# Altium PCB 2020-08-16_06-31-57.PcbDoc
Units mil, origin at the board's own origin, x right, y up, seen from the top; angles counter-clockwise.
Board outline 2200 x 1600 mil, 4 copper layers (Top Layer, MidLayer1, MidLayer2, Bottom Layer); 13 components, 5 nets, 26 pads, 25 vias.
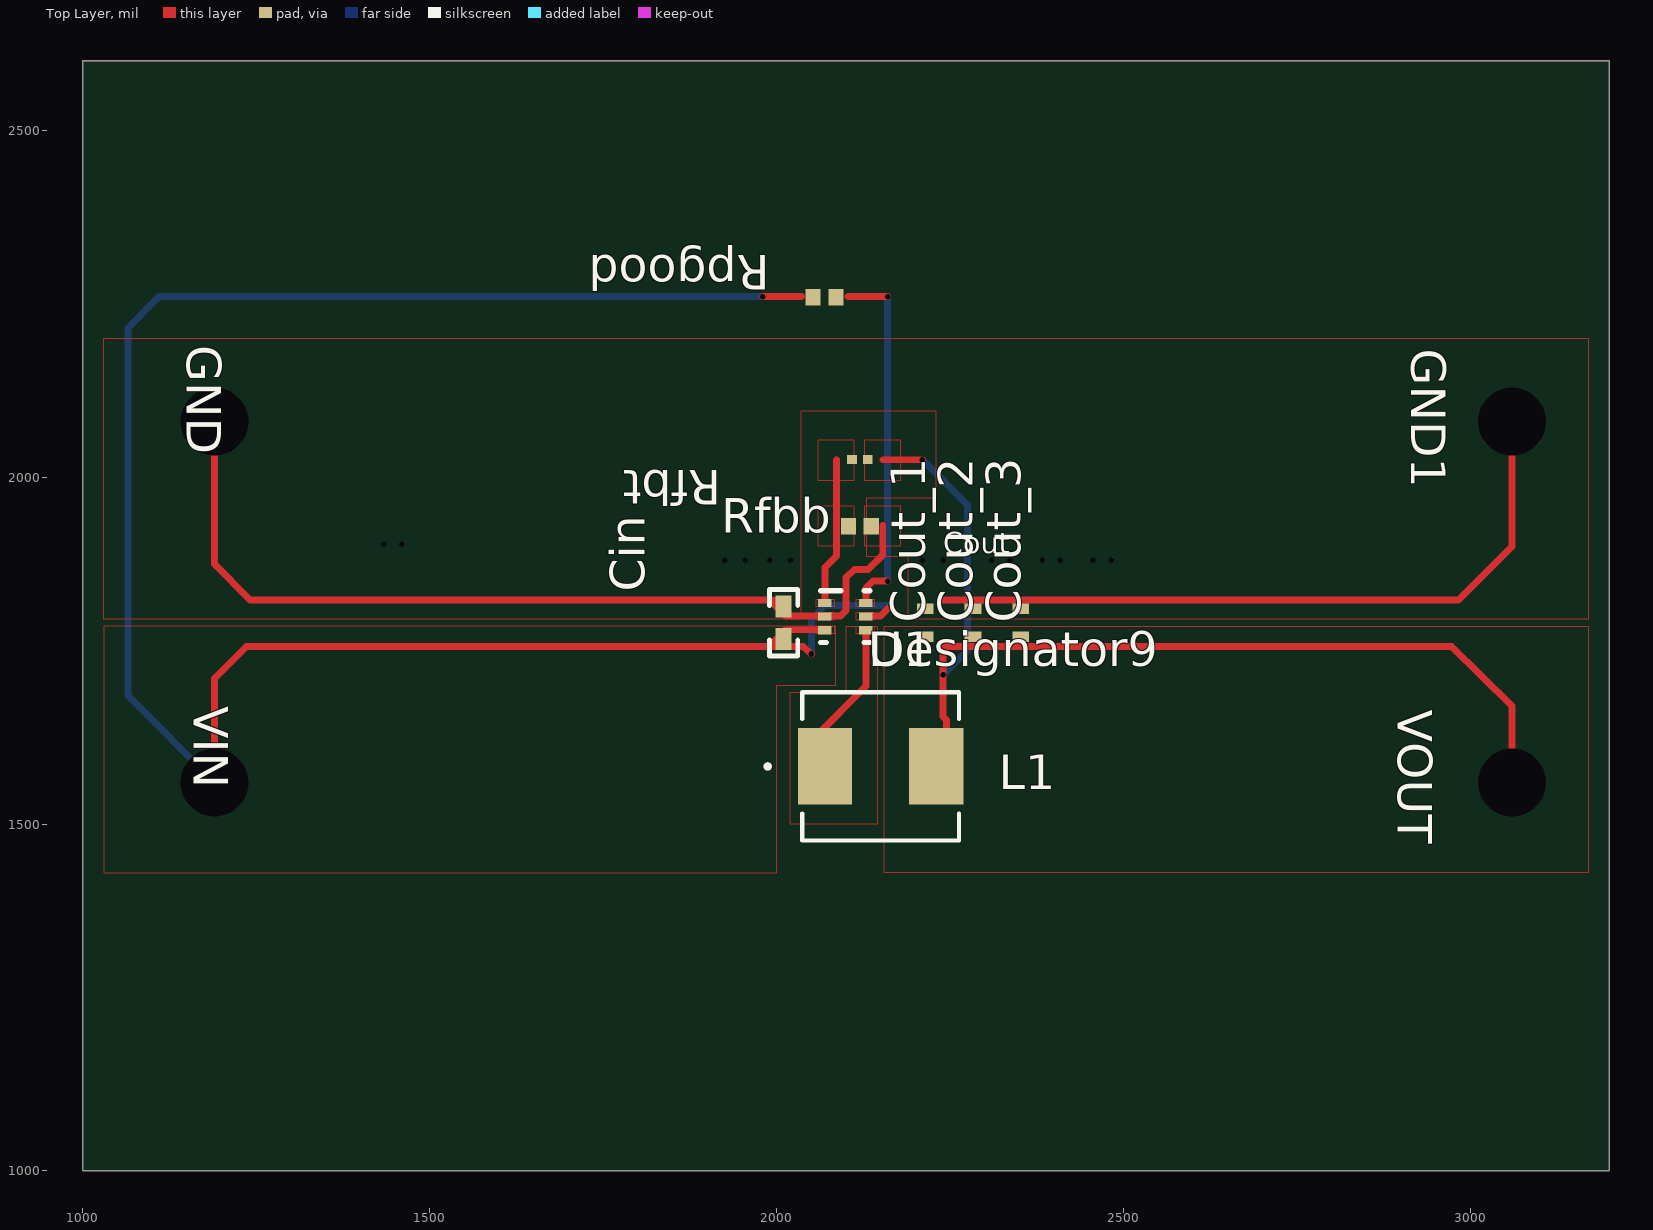
[diagram p0: Top Layer view]
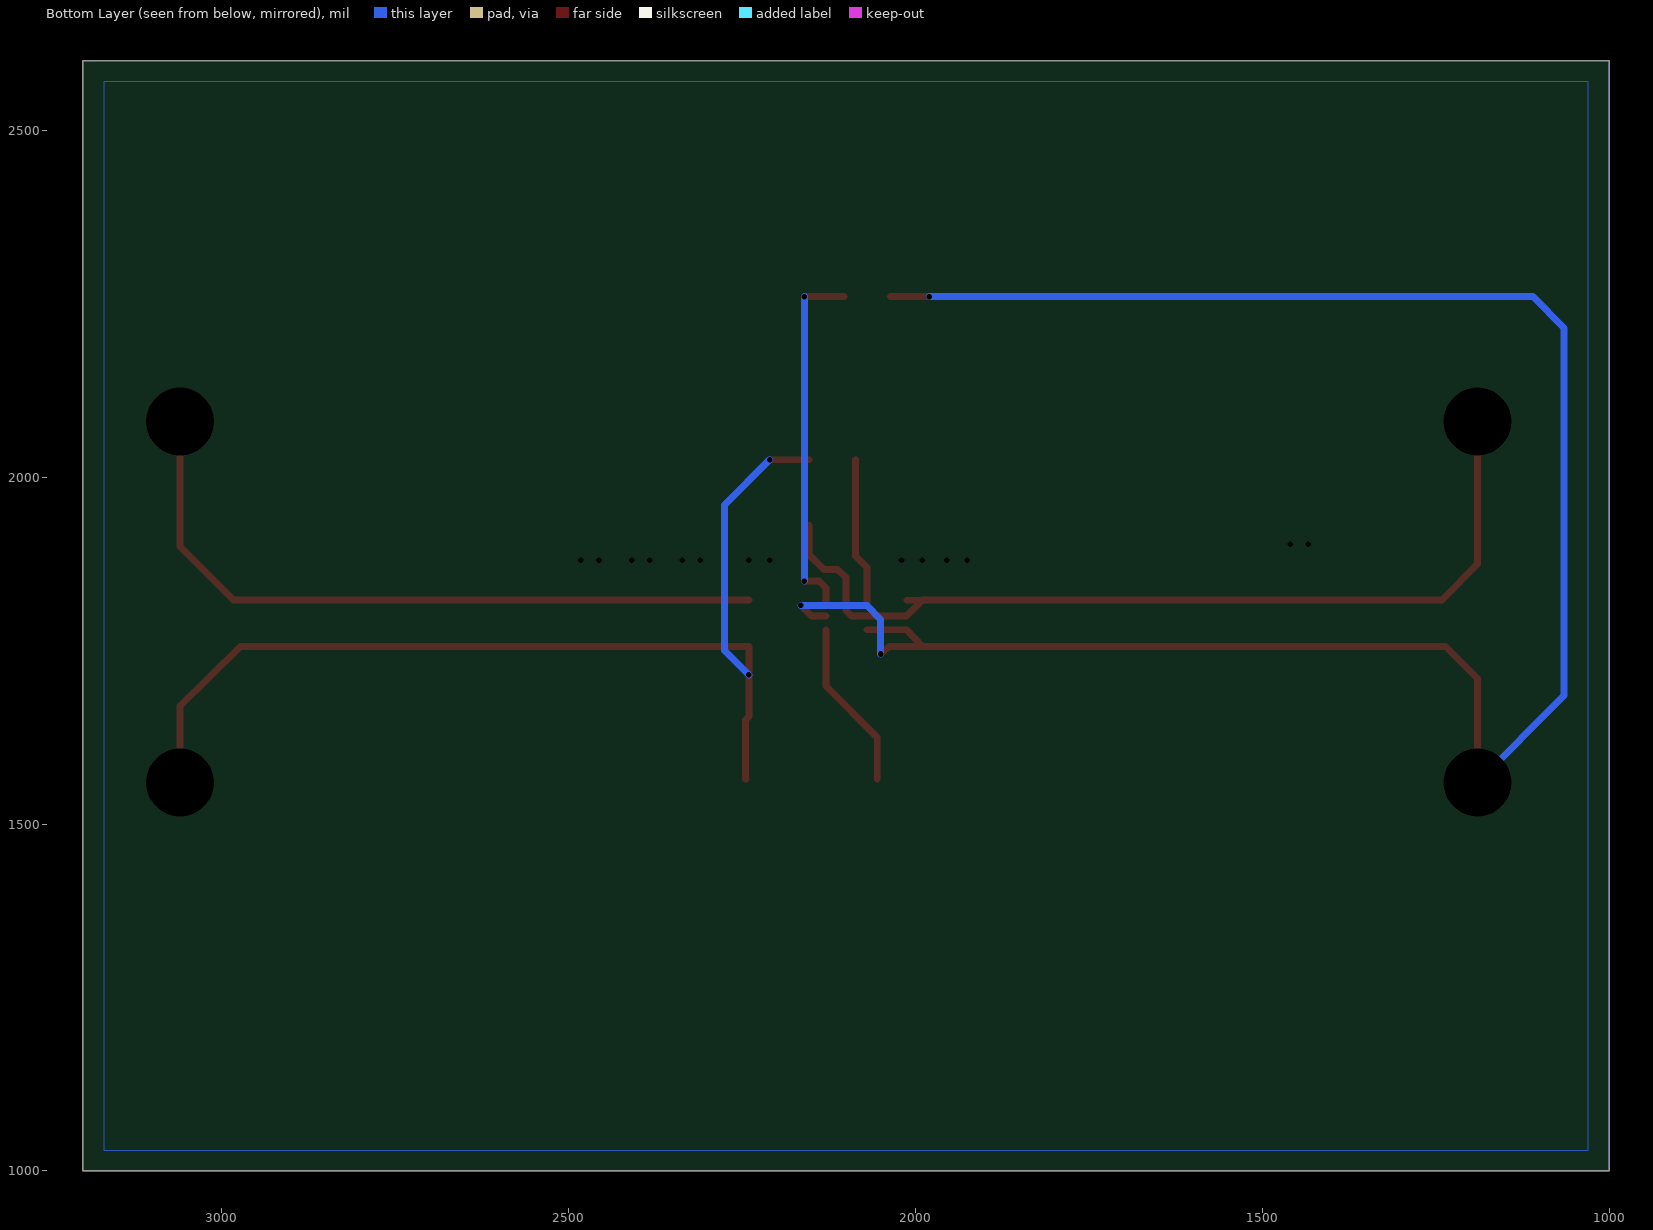
[diagram p1: Bottom Layer view, seen from below]

## Layer stack, top to bottom
Top Layer: signal copper 1.4
Dielectric: core 12.6, FR-4, Dk 4.8
MidLayer1: signal copper 1.4
Dielectric: prepreg 12.6, FR-4, Dk 4.8
MidLayer2: signal copper 1.4
Dielectric: core 12.6, FR-4, Dk 4.8
Bottom Layer: signal copper 1.4

## Board outline
1000,1000 3200,1000 3200,2600 1000,2600

## Design rules (kind name [scope] priority, off if disabled: settings)
PlaneConnect [All] p0: scope1count=1 scope1_0_kind=Board scope1_0_value=Board scope2count=1 scope2_0_kind=Board scope2_0_value=Board commentlength=0 planeconnectstyle=Direct reliefexpansion=20 reliefentries=4 reliefconductorwidth=10 reliefairgap=10
PlaneConnect [All] p1: planeconnectstyle=Direct reliefexpansion=20 reliefentries=4 reliefconductorwidth=10 reliefairgap=10
PolygonConnect [All] p0: scope1count=1 scope1_0_kind=Board scope1_0_value=Board scope2count=1 scope2_0_kind=Board scope2_0_value=Board commentlength=0 connectstyle=Direct reliefconductorwidth=10 reliefentries=4 polygonreliefangle="90 Angle"
PolygonConnect [All] p1: connectstyle=Direct reliefconductorwidth=10 reliefentries=4 polygonreliefangle="90 Angle"

## Components (designator, comment, footprint, x,y, rotation, side; value= is the part's Value field where it differs from the comment)
Cin "" 0402_065 2010,1790 r90 top
Cout_1 "" 0402_070 2214,1790 r90 top
Cout_2 "" 0402_070 2283,1790 r90 top
Cout_3 "" 0402_070 2352,1790 r90 top
GND "" TP-1502 1189,2079 r270 top
GND1 "" TP-1502 3059,2079 r270 top
L1 "" IHLP-2020CZ 2150,1583 r0 top
Rfbb "" 0402 2120,1929 r0 top
Rfbt "" 0201 2120,2025 r180 top
Rpgood "" 0402 2069,2259 r180 top
U1 "" DRL0006A 2099,1799 r0 top
VIN "" TP-1502 1189,1559 r270 top
VOUT "" TP-1502 3059,1559 r270 top

## Footprints (in the part's own frame and the unit in brackets; to place one, negate y for a bottom-side part, rotate by r counter-clockwise, add the part's x,y. Pads: shape width x height; smd on the part's side, far side on the other; paste and mask are expansions set on the pad)
0201 [mil]
  rect 14x13 smd: 1(-11.5,0) 2(11.5,0)
0402 [mil]
  rect 22x24 smd: 1(-16.5,0) 2(16.5,0)
0402_065 [mm]
  rect 0.8x0.6 smd: 1(-0.6,0) 2(0.6,0)
  silkscreen extent -1.22,-0.52 1.22,0.52
0402_070 [mil]
  rect 15x24 smd: 1(-20,0) 2(20,0)
DRL0006A [mm]
  rect 0.5x0.3 smd: 1(-0.75,0.5) 2(-0.75,0) 3(-0.75,-0.5) 4(0.75,-0.5) 5(0.75,0) 6(0.75,0.5)
  silkscreen extent -0.9,-0.95 0.9,0.95
IHLP-2020CZ [mil]
  rect 78x110 smd: 1(-80,0) 2(80,0)
  silkscreen extent -166,-107 113,107
TP-1502 [mil]
  round 65 / inner round 0 / far side round 65 hole 32: 1(0,0)

## Via types
v1: diameter 0, hole 8, Top Layer to Bottom Layer, 21 vias
v2: diameter 0, hole 98, Top Layer to Bottom Layer, 4 vias

## Nets (pads, with @x,y where several pads share a name; then routed paths per layer and width w, separated by ;. In a path a pad name is that pad's centre, name@x,y a point inside that pad or via, vN(x,y) a via of type N, cw(c..) or ccw(c..) an arc to the next point about the centre after c; other vN are vias at no path point)
0: Cin.2 Cout_1.2 Cout_2.2 Cout_3.2 GND1.1 GND.1 Rfbb.2 U1.2 | length 2382.2
  Top Layer w10: v2(1190,2080) 1190,1875 1241,1823 1990,1823 2013,1800 2070,1800 2092,1800 2100,1808 2100,1855 2112,1867 2132,1867 2153,1888 2153,1930 ; 1967,1822.5 Cin.2@2012,1822.5 ; 2240,1823 2983,1823 3060,1900 v2(3060,2080)
  other v1: 1925,1880 1955,1880 1990,1880 2020,1880 2210,1880 2240,1880 2310,1880 2336,1880 2383,1880 2409,1880 2456,1880 2482,1880 1434,1903 1460,1903
1: Rfbb.1 Rfbt.2 U1.1 | length 212.6
  Top Layer w10: U1.1@2070,1819 2070,1870 2086,1886 2086,1930 2086,2025
2: Cin.1 L1.1 Rpgood.2 U1.3 U1.4 U1.5 VIN.1 | length 3326.1
  Top Layer w10: v2(1190,1560) 1190,1710 1236,1756 1990,1756 ; 1967,1755.5 Cin.1@2012,1755.5 ; v1(1980,2260) 2036,2260 ; v1(2050,1745) 2038,1756 1990,1756 ; L1.1@2055,1565 2055,1625 2129,1699 U1.4@2129,1780 ; U1.3@2070,1780 2013,1780 1990,1756 ; U1.5@2129,1800 2150,1800 v1(2165,1815)
  Bottom Layer w10: v2(1190,1560) 1065,1685 1065,2215 1110,2260 v1(1980,2260) ; v1(2050,1745) 2050,1795 2070,1815 v1(2165,1815)
5: Cout_1.1 Cout_2.1 Cout_3.1 L1.2 Rfbt.1 VOUT.1 | length 1567.8
  Top Layer w10: 2153,2025 v1(2210,2025) ; L1.2@2244,1565 2245,1565 2245,1650 2240,1655 v1(2240,1715) 2240,1756 2973,1756 3060,1670 v2(3060,1560)
  Bottom Layer w10: v1(2210,2025) 2275,1960 2275,1750 v1(2240,1715)
6: Rpgood.1 U1.6 | length 523.1
  Top Layer w10: 2103,2260 v1(2160,2260) ; U1.6@2129,1819 2129,1840 2139,1850 v1(2160,1850)
  Bottom Layer w10: v1(2160,1850) v1(2160,2260)

## Polygon pours and split planes (outlines as drawn)
6 on Top Layer " " (solid, pour order 0): 2115,1813 2115,1824 2141,1824 2141,1813
2 on Top Layer " " (solid, pour order 1): 2115,1794 2115,1805 2141,1805 2141,1794
2 on Top Layer " " (solid, pour order 2): 2115,1774 2115,1785 2141,1785 2141,1774
1 on Top Layer " " (solid, pour order 3): 2057,1813 2057,1824 2083,1824 2083,1813
2 on Top Layer " " (solid, pour order 4): 2057,1774 2057,1785 2083,1785 2083,1774
1 on Top Layer " " (solid, pour order 5): 2060,1900 2060,1959 2111,1959 2111,1900
1 on Top Layer " " (solid, pour order 6): 2060,1995 2060,2054 2111,2054 2111,1995
5 on Top Layer " " (solid, pour order 7): 2127,1995 2127,2054 2178,2054 2178,1995
2 on Top Layer " " (solid, pour order 8): 2145,1785 2145,1500 2020,1500 2020,1690 2100,1690 2100,1785
5 on Top Layer " " (solid, pour order 9): 3170,1785 3170,1430 2155,1430 2155,1785
2 on Top Layer " " (solid, pour order 10): 2000,1430 2000,1700 2085,1700 2085,1785 1030,1785 1030,1430
0 on Top Layer " " (solid, pour order 11): 2057,1794 2057,1805 2083,1805 2083,1794
0 on Top Layer " " (solid, pour order 12): 2127,1900 2127,1959 2178,1959 2178,1900
0 on Top Layer " " (solid, pour order 14): 2130,1970 2230,1970 2230,2095 2035,2095 2035,1795 1030,1795 1030,2200 3170,2200 3170,1795 2190,1795 2190,1885 2130,1885
0 on Bottom Layer " " (solid, pour order 13): 1030,2570 3170,2570 3170,1030 1030,1030

## Other copper
Multi-Layer:
  the board outline again, w1

## Silkscreen, mask and mechanical layers (free items; w line width, h text height)
Top Overlay:
  text "Cout" at 2240,1890 h30

## Text inside footprints (layer, text, board x,y; h text height)
U1: Top Overlay "Designator9" at 2132,1727 h50